# Altium PCB uPICoid-revA0.PcbDoc
Units mil, origin at the board's own origin, x right, y up, seen from the top; angles counter-clockwise.
Board outline 909.45 x 1421.26 mil, 2 copper layers (Top Layer, Bottom Layer); 36 components, 38 nets, 160 pads, 50 vias.
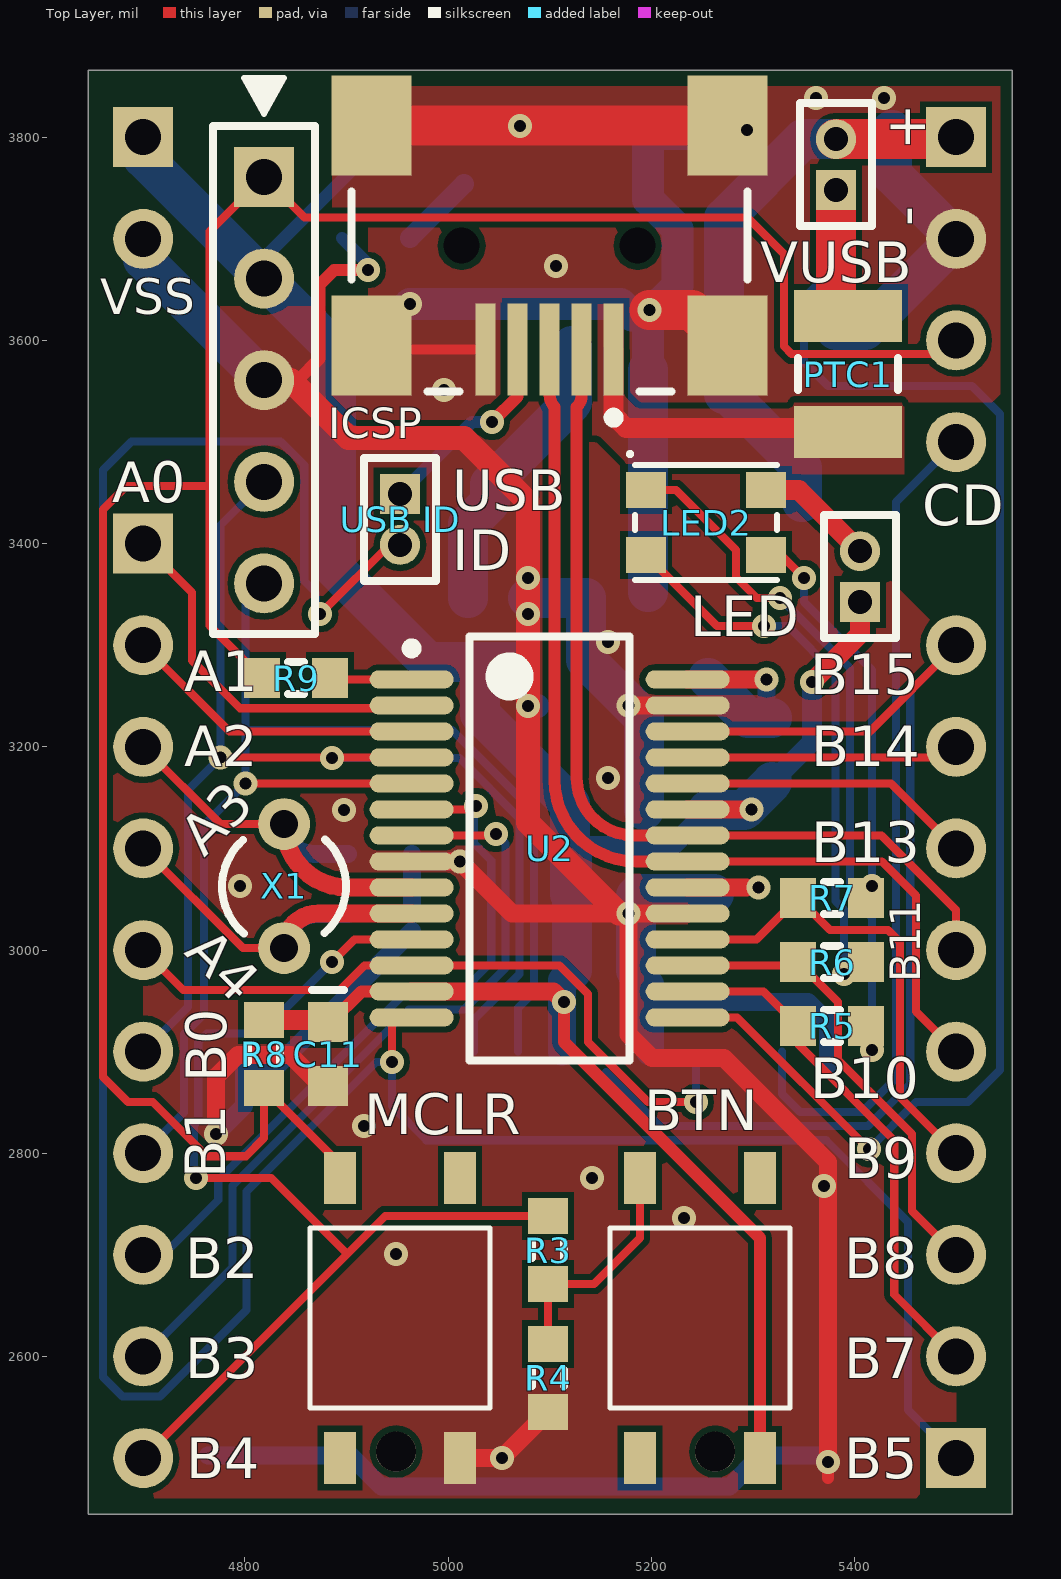
[diagram p0: Top Layer view]
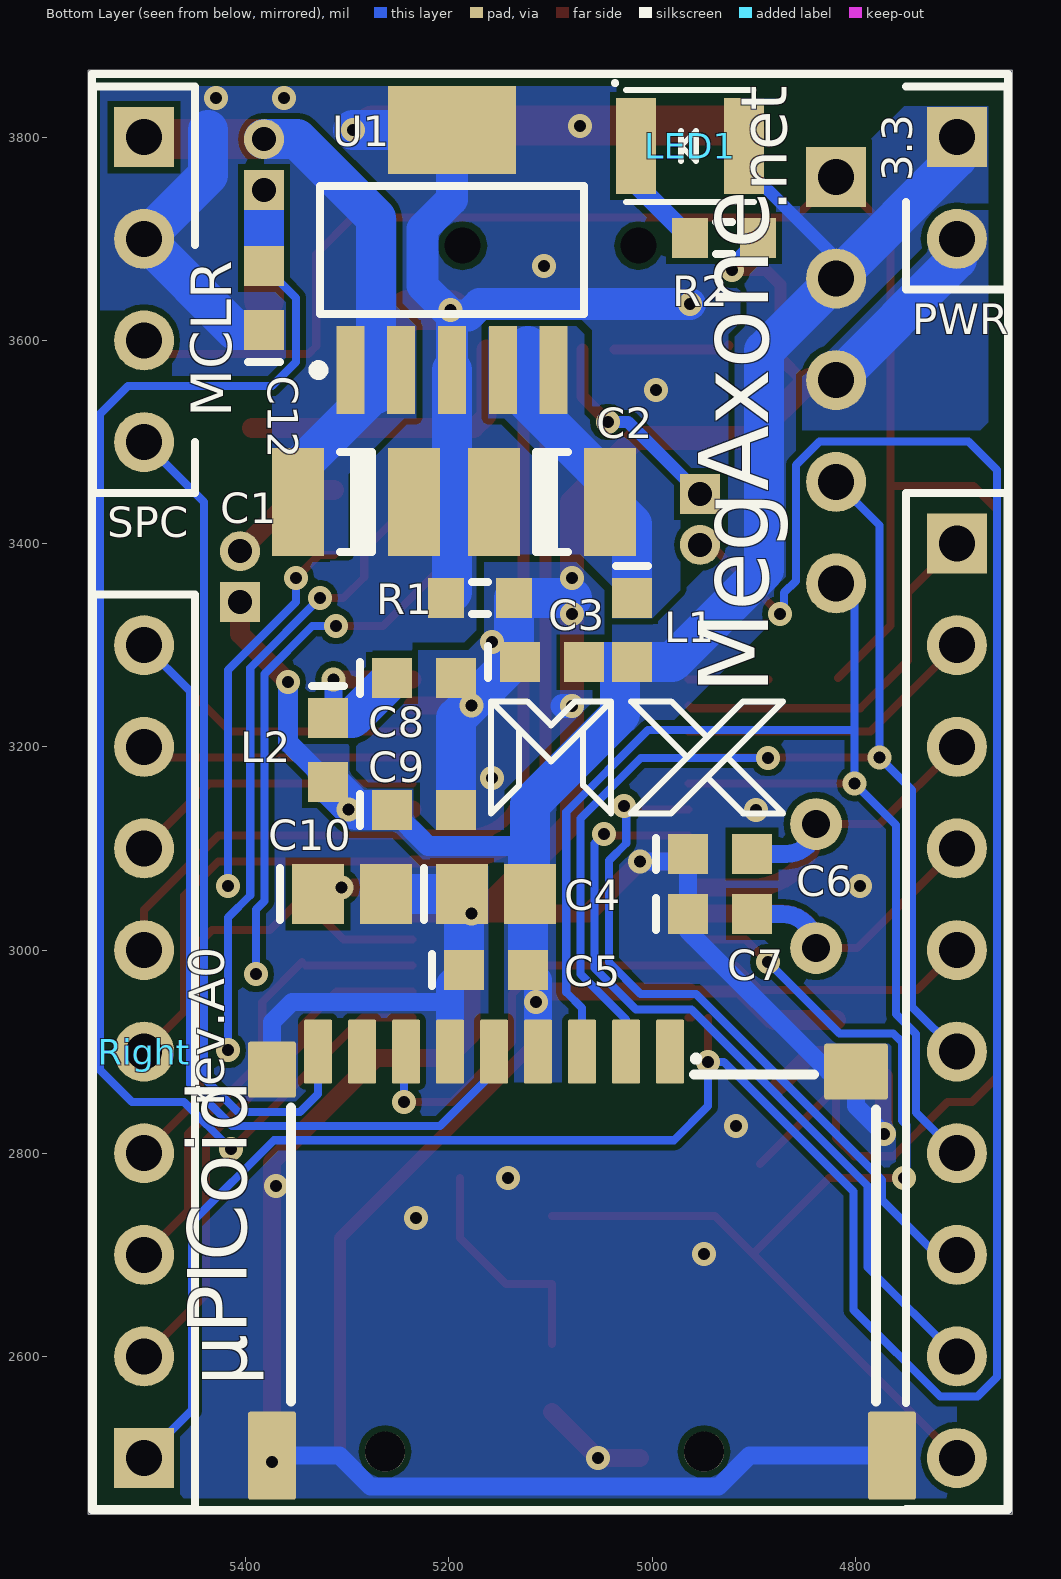
[diagram p1: Bottom Layer view, seen from below]

## Layer stack, top to bottom
Top Layer: signal copper 1.4
Dielectric: dielectric 12.6, FR-4, Dk 4.8
Bottom Layer: signal copper 1.4

## Board outline
4645.67,2444.88 5555.12,2444.88 5555.12,3866.14 4645.67,3866.14

## Design rules (kind name [scope] priority, off if disabled: settings)
Clearance [All] p1: gap=6
DiffPairsRouting [All] p1: maxlimit=10 minlimit=10 mostfreqgap=10 maxuncoupledlength=500
HoleSize [All] p1: absolutevalues=TRUE maxlimit=248.03 minlimit=11.81 maxpercent=80.000 minpercent=20.000
HoleToHoleClearance [All] p1: gap=9.84 allowstackedmicrovias=TRUE
MinimumSolderMaskSliver [All] p1: minsoldermaskwidth=3.94
PlaneConnect [All] p1: planeconnectstyle=Direct reliefexpansion=20 reliefentries=4 reliefconductorwidth=10 reliefairgap=10
PolygonConnect [All] p1: connectstyle=Direct reliefconductorwidth=10 reliefentries=4 polygonreliefangle="90 Angle"
RoutingVias [All] p1: holewidth=11.81 width=23.62 viastyle="Through Hole" minholewidth=11.81 minwidth=23.62 maxholewidth=248.03 maxwidth=275.59
SilkToSilkClearance [All] p1: silktosilkclearance=3.94
SilkscreenOverComponentPads [All] p1: minsilkscreentomaskgap=3.94
SolderMaskExpansion [All] p1: expansion=1.97
Width [All] p1: maxlimit=500 minlimit=6 preferedwidth=6
21 further rules are at their usual default settings.

## Classes and differential pairs
differential pair USB_D: +USB_D_P -USB_D_N

## Components (designator, comment, footprint, x,y, rotation, side; value= is the part's Value field where it differs from the comment)
BTN "Tact Button NO" "TACT SMD 4.5×4.5mm" 5188.98,2500 r90 top
C1 "10µF" CAPC3225N 5291.34,3440.94 r0 bottom
C2 "10µF" CAPC3225N 5098.43,3440.94 r180 bottom
C3 "100nF" CAPC1608N 5098.43,3283.46 r180 bottom
C4 "10µF" CAPC2012N 5153.54,3055.12 r180 bottom
C5 "100nF" CAPC1608N 5153.54,2980.32 r180 bottom
C6 "15pF" CAPC1608N 4933.07,3094.49 r180 bottom
C7 "15pF" CAPC1608N 4933.07,3035.43 r180 bottom
C8 "100nF" CAPC1608N 5224.41,3267.72 r180 bottom
C9 "100nF" CAPC1608N 5224.41,3137.8 r180 bottom
C10 "10µF" CAPC2012N 5295.28,3055.12 r180 bottom
C11 "100nF" CAPC1608N 4881.89,2897.64 r270 top
C12 "100nF" CAPC1608N 5381.89,3641.73 r90 bottom
ICSP "Header 5" HDR1X5 4818.9,3760.84 r270 top (schematic designator ISCP)
L1 "120R" INDC1608N 5019.69,3314.96 r270 bottom
L2 "120R" INDC1608N 5318.9,3196.85 r270 bottom
LED "MHDR1X2" MHDR1X2 5405.51,3342.52 r90 top
LED1 "Green" "LED PLCC-2" 5015.75,3791.34 r90 bottom
LED2 "LED RGB common A" "LED 3528m" 5204.72,3389.76 r90 top
MCLR "Tact Button NO" "TACT SMD 4.5×4.5mm" 4893.7,2500 r90 top
PTC1 "500mA" RESC3225N 5393.7,3566.93 r90 top
R1 "0" RESC1608N 5169.29,3346.46 r180 bottom
R2 "470" RESC1608N 4929.13,3700.79 r0 bottom
R3 "470" RESC1608N 5098.43,2704.72 r270 top
R4 "10K" RESC1608N 5098.43,2578.74 r90 top
R5 "470" RESC1608N 5377.95,2925.2 r0 top
R6 "330" RESC1608N 5377.95,2988.19 r0 top
R7 "330" RESC1608N 5377.95,3051.18 r0 top
R8 "10K" RESC1608N 4818.9,2897.64 r90 top
R9 "470" RESC1608N 4850.39,3267.72 r0 top
Right "Header 9" HDR1X9 5500,2500 r90 bottom
U1 "TPS7A4533" SOT223-6N 5196.85,3688.98 r90 bottom
U2 "PIC32MX250F128B" SSOP28_N 5100,3100 r0 top
"USB ID" "MHDR1X2" MHDR1X2 4952.76,3448.82 r270 top (schematic designator "USD ID")
VUSB "MHDR1X2" MHDR1X2 5381.89,3748.03 r90 top
X1 "Crystal" BCY-W2/D3.1 4838.58,3062.99 r0 top

## Footprints (in the part's own frame and the unit in brackets; to place one, negate y for a bottom-side part, rotate by r counter-clockwise, add the part's x,y. Pads: shape width x height; smd on the part's side, far side on the other; paste and mask are expansions set on the pad)
BCY-W2/D3.1 [mm] "Crystal, Thru-Hole; 2 Leads; Body 3.1 x 8.2 mm (Dia.xH)"
  round 1.3 hole 0.7: 1(0,1.55) 2(0,-1.55)
  silkscreen extent -1.55,-1.19 1.55,1.17
CAPC1608N [mm] "Chip Capacitor, Body 1.6x0.8mm, IPC Medium Density"
  rect 1x1 smd: 1(-0.8,0) 2(0.8,0)
  silkscreen extent -1.6,-0.4 -1.6,0.4, body extent -0.87,-0.48 0.87,0.48, height 0.85
CAPC2012N [mm] "Chip Capacitor, Body 2.0x1.3mm, IPC Medium Density"
  rect 1.3x1.5 smd: 1(-0.85,0) 2(0.85,0)
  silkscreen extent -1.8,-0.65 -1.8,0.65, body extent -1.1,-0.72 1.1,0.72, height 1.1
CAPC3225N [mm] "Chip Capacitor, Body 3.2x2.5mm, IPC Medium Density"
  rect 1.3x2.7 smd: 1(-1.45,0) 2(1.45,0)
  silkscreen extent -0.4,-1.25 0.4,1.25, body extent -1.7,-1.35 1.7,1.35, height 1.35
HDR1X5 [mm] "Connector; Header; 5 Position"
  rect 1.5x1.5 hole 0.9: 1(0,0)
  round 1.5 hole 0.9: 2(2.54,0) 3(5.08,0) 4(7.62,0) 5(10.16,0)
  silkscreen extent -1.27,-1.27 11.43,1.27
HDR1X9 [mm] "Connector; Header; 9 Position"
  rect 1.5x1.5 hole 0.9: 1(0,0)
  round 1.5 hole 0.9: 2(2.54,0) 3(5.08,0) 4(7.62,0) 5(10.16,0) 6(12.7,0) 7(15.24,0) 8(17.78,0) 9(20.32,0)
  silkscreen extent -1.27,-1.27 21.59,1.27
INDC1608N [mm] "Chip Inductor, Body 1.6x0.8mm, IPC Medium Density"
  rect 1x1 smd: 1(-0.8,0) 2(0.8,0)
  silkscreen extent -1.6,-0.4 -1.6,0.4, body extent -0.87,-0.48 0.87,0.48, height 0.71
"LED 3528m" [mm] "LED RGB 3528m common A"
  rect 0.9x1 smd: 1(1.6,0.25) 2(1.6,-2.75) 3(-0.025,-2.75) 4(-0.025,0.25)
  silkscreen extent -0.65,-3.03 2.52,0.67, body extent -0.65,-3.03 2.22,0.53, height 1.9
"LED PLCC-2" [mm] "LED PLCC-2 3.2x2.8mm"
  rect 2.4x1 smd: 1(0,0) 2(0,-2.7)
  silkscreen extent -1.4,-2.95 1.6,0.55, body extent -1.4,-2.95 1.4,0.25, height 1.9
MHDR1X2 [mm] "Connector; Header; 2 Position"
  rect 1x1 hole 0.6: 1(0,0)
  round 1 hole 0.6: 2(1.27,0)
  silkscreen extent -0.9,-0.9 2.17,0.9
RESC1608N [mm] "Chip Resistor, Body 1.6x0.8mm, IPC Medium Density"
  rect 0.9x1 smd: 1(-0.85,0) 2(0.85,0)
  silkscreen extent -0.2,-0.4 0.2,0.4, body extent -0.85,-0.48 0.85,0.48, height 0.6
RESC3225N [mm] "Chip Resistor, Body 3.2x2.5mm, IPC Medium Density"
  rect 1.3x2.7 smd: 1(-1.45,0) 2(1.45,0)
  silkscreen extent -0.4,-1.25 0.4,1.25, body extent -1.68,-1.32 1.68,1.32, height 0.71
SOT223-6N [mm] "SOT223, 6-Leads, Body 6.5x3.5mm, Pitch 1.27mm, Lead Span 7mm, IPC Medium Density"
  rect 2.2x0.7 smd: 1(-3,2.54) 2(-3,1.27) 3(-3,0) 4(-3,-1.27) 5(-3,-2.54)
  rect 2.2x3.2 smd: 6(3,0)
  silkscreen extent -3.12,-3.3 1.6,3.47, body extent -1.77,-3.27 1.77,3.27, height 1.8
SSOP28_N [mm] "SOP, 28-Leads, Body 10.2x5.3mm, Pitch 0.65mm, IPC Medium Density"
  oval 2.1x0.45 smd: 1(-3.45,4.225) 2(-3.45,3.575) 3(-3.45,2.925) 4(-3.45,2.275) 5(-3.45,1.625) 6(-3.45,0.975) 7(-3.45,0.325) 8(-3.45,-0.325) 9(-3.45,-0.975) 10(-3.45,-1.625) 11(-3.45,-2.275) 12(-3.45,-2.925) 13(-3.45,-3.575) 14(-3.45,-4.225) 15(3.45,-4.225) 16(3.45,-3.575) 17(3.45,-2.925) 18(3.45,-2.275) 19(3.45,-1.625) 20(3.45,-0.975) 21(3.45,-0.325) 22(3.45,0.325) 23(3.45,0.975) 24(3.45,1.625) 25(3.45,2.275) 26(3.45,2.925) 27(3.45,3.575) 28(3.45,4.225)
  silkscreen extent -3.57,-5.3 2,5.3, body extent -2.7,-5.3 2.7,5.3, height 1.99
"TACT SMD 4.5×4.5mm" [mm] "Tact push-button SMD 4.5×4.5mm body"
  rect 1.3x0.8 smd: 1(0,-3) 2(7,-3) 3(0,0) 4(7,0)
  silkscreen extent 1.25,-3.75 5.75,0.75, body extent 1.25,-3.75 5.75,0.75, height 3.8

## Part data
C1 C2 C3 C4 C5 C6 C7 C8 C9 C10 C11 C12: library part Capacitor
ICSP: "Header, 5-Pin"
L1 L2: library part Inductor
LED "USB ID" VUSB: "Header, 2-Pin"
LED1: library part LED
PTC1: library part PTC
R1 R2 R3 R4 R5 R6 R7 R8 R9: library part Resistor
Right: "Header, 9-Pin"
U1: library part TPS7A45xx
U2: library part PIC32MX220FxxxB

## Free pads (board coordinates)
  rect 59.06x59.06 hole 35.43: 1(4700,3400) 1(4700,3800) 1(5500,3800)
  rrect10% 27.56x62.99 smd far side: 1(4982.28,2900) 2(5025.59,2900) 3(5068.9,2900) 4(5112.2,2900) 5(5155.51,2900) 6(5198.82,2900) 7(5242.13,2900) 8(5285.43,2900) 9(5328.74,2900)
  rect 19.68x90.55 smd: 1(5162.99,3590.94) 2(5131.5,3590.94) 3(5100,3590.94) 4(5068.51,3590.94) 5(5037.01,3590.94)
  round 59.06 hole 35.43: 2(4700,3300) 2(4700,3700) 2(5500,3700) 3(4700,3200) 3(5500,3600) 4(4700,3100) 4(5500,3500) 5(4700,3000) 6(4700,2900) 7(4700,2800) 8(4700,2700) 9(4700,2600) 10(4700,2500)
  rect 78.74x98.43 smd: 6(4924.8,3594.88) 7(4924.8,3811.42) 8(5275.2,3594.88) 9(5275.2,3811.42)
  rrect10% 47.24x55.12 smd far side: 10(5374.02,2882.28)
  rrect10% 47.24x86.61 smd far side: 11(5374.02,2502.36) 12(4763.78,2502.36)
  rrect10% 62.99x55.12 smd far side: 13(4799.21,2880.32)
  round 23.62 hole 35.43 unplated: MH1(5013.39,3693.31) MH2(5186.61,3693.31)
  round 39.37 hole 39.37 unplated: ""(4948.82,2506.3) ""(5262.8,2506.3)

## Via types
v1: diameter 23.62, hole 11.81, Top Layer to Bottom Layer, tented both sides, 49 vias
v2: diameter 23.62/23.62 (per signal layer), hole 11.81, Top Layer to Bottom Layer, tented both sides, 1 vias

## Nets (pads, with @x,y where several pads share a name; then routed paths per layer and width w, separated by ;. In a path a pad name is that pad's centre, name@x,y a point inside that pad or via, vN(x,y) a via of type N, cw(c..) or ccw(c..) an arc to the next point about the centre after c; other vN are vias at no path point)
GND: C1.1 C2.1 C12.1 pad.2@5500,3700 pad.5@5037.01,3590.94 pad.6@4924.8,3594.88 pad.7@4924.8,3811.42 pad.8@5275.2,3594.88 pad.9@5275.2,3811.42 R1.1 U1.3 U1.6 | length 1659.1
  Top Layer w10: pad.6@4924.8,3594.88 4928.74,3590.94 pad.5@5037.01,3590.94
  Top Layer w39.37: pad.7@4924.8,3811.42 pad.9@5275.2,3811.42 ; v1(5198.52,3629.92) 5240.16,3629.92 pad.8@5275.2,3594.88
  Bottom Layer w31.5: v1(4962.5,3635.92) 5169.64,3635.92 5180.95,3624.61 v1@5196.85,3624.61 ; U1.3 v1@5196.85,3624.61 ; U1.6 5196.85,3738.88 5226.08,3709.65 5226.08,3653.84 v1@5196.85,3624.61
  Bottom Layer w39.37: R1.1@5196.85,3352.36 U1.3 ; U1.6 v1(5294.1,3807.09) ; C12.1 5410.24,3610.24 5500,3700 5437.01,3762.99 5437.01,3807.08
  other v1: 4996.06,3551.18 5106.3,3673.23 5070.87,3811.02 5362.2,3838.58 5429.13,3838.58
NetBTN_2: BTN.4 R3.2 R4.2 | length 227.4
  Top Layer w8: R4.2 R3.2 5143.7,2671.26 5188.98,2716.54 BTN.4
NetC2_2: C2.2 L1.1 U1.4 U1.5 | length 290.4
  Bottom Layer w39.37: L1.1 5019.69,3419.29 C2.2 5041.34,3458.66 5122.05,3539.37 5122.05,3594.49
NetC6_2: C6.2 pad.3@4700,3200 U2.9 X1.1 | length 411.1
  Top Layer w8: pad.3@4700,3200 4775.98,3124.02 X1.1
  Top Layer w17.72: X1.1 ccw(c4900.98,3124.02) 4900.98,3061.61 U2.9
  Bottom Layer w17.72: X1.1 ccw(c4868.11,3124.02) 4868.11,3094.49 C6.2
NetC7_2: C7.2 pad.4@4700,3100 U2.10 X1.2 | length 406.3
  Top Layer w8: pad.4@4700,3100 4798.03,3001.97 X1.2
  Top Layer w17.72: X1.2 cw(c4872.64,3001.97) 4872.64,3036.02 U2.10
  Bottom Layer w17.72: X1.2 cw(c4872.05,3001.97) 4872.05,3035.43 C7.2
NetC8_1: C8.1 L2.1 U2.28 | length 189.7
  Top Layer w17.72: U2.28 v1(5313.58,3266.34)
  Bottom Layer w17.72: L2.1@5313.58,3233.66 v1(5313.58,3266.34)
  Bottom Layer w39.37: C8.1 5295.28,3228.35 L2.1
NetC10_1: C10.1 U2.20 | length 58.1
  Top Layer w17.72: U2.20 v1@5293.9,3061.61
  other v1: 5305.71,3061.61
NetCONN1_1: pad.1@5162.99,3590.94 PTC1.1 | length 300.7
  Top Layer w19.68: pad.1@5162.99,3590.94 5162.99,3525.98 5175.2,3513.78 PTC1.1@5393.7,3513.78
NetCONN1_4: "USB ID.1" pad.4@5068.51,3590.94 | length 201.6
  Top Layer w11.81: v1(5043.31,3519.68) 5068.51,3544.88 pad.4@5068.51,3590.94
  Bottom Layer w11.81: 4952.76,3448.82 5023.62,3519.68 v1(5043.31,3519.68)
NetISCP_1: ICSP.1 MCLR.4 pad.3@5500,3600 R8.1 R9.1 | length 2369.4
  Top Layer w8: R9.1 4765.37,3319.28 4765.37,3456.69 ; MCLR.4@4893.7,2789.37 R8.1 4818.9,2814.96 4801.02,2797.09 4762.62,2797.09 4709.31,2850.39 4685.04,2850.39 4660.47,2874.96 4660.47,3433.67 4683.5,3456.69 4765.37,3456.69 ; pad.3@5486.61,3586.61 5338.22,3586.61 5330.55,3594.28 5330.55,3685.2 5294.72,3721.02 4858.72,3721.02 ICSP.1 4765.37,3707.32 4765.37,3456.69 ; pad.3@5490.55,3590.55 pad.3@5500,3600
NetISCP_4: ICSP.4 pad.2@5025.59,2900 pad.6@4700,2900 U2.4 | length 1255.6
  Top Layer w8: v1(4776.18,3189.57) U2.4
  Bottom Layer w8: pad.6@4700,2900 4744.09,2944.09 4744.09,3157.48 v1(4776.18,3189.57) 4776.18,3418.13 ICSP.4 ; v1(4885.83,3188.98) 5011.16,3188.98 5070.49,3129.65 5070.49,2976.38 5025.59,2931.48 pad.2@5025.59,2900
NetISCP_5: ICSP.5 pad.3@5068.9,2900 pad.7@4700,2800 U2.5 | length 1315.3
  Top Layer w8: v1(4800.59,3163.98) U2.5
  Bottom Layer w8: pad.7@4700,2800 4740.16,2840.16 4740.16,2917.32 4759.84,2937.01 4759.84,3123.23 v1(4800.59,3163.98) 4800.59,3216.54 ; ICSP.5@4800.59,3350.39 4800.59,3216.54 ; pad.3@5068.9,2900 5068.9,2942.91 5084.49,2958.5 5084.49,3135.98 5003.94,3216.54 4800.59,3216.54
NetLED1_K: LED1.1 R2.2 | length 75.2
  Bottom Layer w19.68: R2.2 LED1.1@5015.75,3753.94
NetLED2_A: LED2.2 LED.2 | length 117.5
  Top Layer w19.68: LED2.2 5345.28,3452.76 LED.2
NetLED2_KB: LED2.3 R7.2 | length 377.7
  Top Layer w8: LED2.3 5327.76,3388.78 v1(5350.39,3366.14)
  Bottom Layer w8: v1(5350.39,3366.14) 5350.39,3342.52 5417.32,3275.59 v1(5417.32,3062.99)
NetLED2_KG: LED2.4 R6.2 | length 533.9
  Top Layer w8: LED2.4 5264.76,3318.9 v1(5311.02,3318.9)
  Bottom Layer w8: v1(5311.02,3318.9) 5334.42,3318.9 5381.51,3271.8 5381.51,3048.16 5389.76,3039.91 v1(5389.76,2976.38)
NetLED2_KR: LED2.1 R5.2 | length 674
  Top Layer w8: LED2.1 5224.41,3452.76 5283.31,3393.86 5283.31,3366.92 5303.89,3346.34 v1(5326.77,3346.34)
  Bottom Layer w8: v1(5326.77,3346.34) 5395.51,3277.6 5395.51,3053.96 5417.32,3032.15 v1(5417.32,2901.57)
NetLeft_1: pad.1@4700,3400 U2.2 | length 371.6
  Top Layer w8: pad.1@4700,3400 4748.03,3351.97 4748.03,3285.07 4795.07,3238.03 4961.46,3238.03 U2.2
NetLeft_2: pad.2@4700,3300 U2.3 | length 299.3
  Top Layer w8: pad.2@4700,3300 4784.84,3215.16 U2.3
NetLeft_5: pad.5@4700,3000 pad.7@5242.13,2900 U2.12 | length 701.4
  Top Layer w8: pad.5@4700,3000 4739.37,2960.63 4893.7,2960.63 4917.91,2984.84 U2.12 5109.65,2984.84 5137.8,2956.69 5137.8,2909.45 5196.85,2850.39 v1(5244.09,2850.39)
  Bottom Layer w8: v1(5244.09,2850.39) pad.7@5244.09,2898.03
NetLeft_8: pad.8@4700,2700 U2.6 | length 695
  Top Layer w8: U2.6 v1@5024.21,3138.39
  Bottom Layer w8: pad.8@4700,2700 4719.69,2700 4773.78,2754.09 4773.78,2773.78 4956.69,2956.69 5011.21,2956.69 5042.49,2987.98 5042.49,3088.08 5025.43,3105.14 5025.43,3139.61 v1(5027.56,3141.73)
NetLeft_9: pad.9@4700,2600 U2.7 | length 779.3
  Top Layer w8: U2.7 v1@5045.87,3112.8
  Bottom Layer w8: pad.9@4700,2600 4787.78,2687.78 4787.78,2767.98 4961.3,2941.5 5015.81,2941.5 5056.49,2982.18 5056.49,3104.93 v1(5047.24,3114.17)
NetLeft_10: pad.10@4700,2500 R3.1 U2.11 | length 1065.3
  Top Layer w8: pad.10@4700,2500 4900.79,2700.79 ; v1(4751.97,2775.59) 4825.98,2775.59 4900.79,2700.79 ; v1(4885.83,2988.19) 4908.07,3010.43 U2.11 ; R3.1 4938.19,2738.19 4900.79,2700.79
  Bottom Layer w8: v1(4751.97,2775.59) 4749.84,2777.72 4749.84,2827.93 4754.16,2832.25 4754.16,2909.45 4762.58,2917.87 4815.51,2917.87 v1(4885.83,2988.19)
NetR5_1: R5.1 Right.2 U2.16 | length 512.4
  Top Layer w8: U2.16 5310.43,2959.25 R5.1 5344.49,2907.37 5439.2,2812.66 5439.2,2660.8 Right.2
NetR6_1: R6.1 Right.3 U2.17 | length 457.9
  Top Layer w8: U2.17 R6.1@5341.14,2984.84 ; R6.1 5383.7,2948.98 5383.7,2891.89 5456.69,2818.9 5456.69,2743.31 Right.3
NetR7_1: R7.1 Right.4 U2.18 | length 474.6
  Top Layer w8: U2.18 5303.74,3010.43 R7.1 5375.98,3019.68 5433.07,3019.68 5444.88,3007.87 5444.88,2855.12 Right.4
NetR9_2: R9.2 U2.1 | length 78.9
  Top Layer w8: R9.2@4885.24,3266.34 U2.1
NetRight_1: "USB ID.2" Right.1 U2.14 | length 2762
  Top Layer w8: v1@4870.08,3334.65 4877.95,3334.65 4942.13,3398.82 4952.76,3398.82 ; v1(4944.88,2889.76) U2.14@4944.88,2933.07 ; U2.14@4961.22,2933.66 U2.14
  Bottom Layer w8: v1@4870.08,3334.65 4870.08,3351.72 4858.43,3363.37 4858.43,3477.22 4835.27,3500.37 4688.4,3500.37 4660.47,3472.44 4660.47,2579.69 4679.69,2560.47 4716.37,2560.47 4801.78,2645.88 4801.78,2762.18 4929.36,2889.76 v1(4944.88,2889.76) 4944.88,2846.46 4978.57,2812.77 5372.27,2812.77 5452.76,2732.28 5452.76,2547.24 Right.1
  other v1: 4874.02,3330.71
NetRight_7: Right.7 U2.24 | length 290.7
  Top Layer w8: U2.24 5436.02,3163.98 Right.7
NetRight_8: Right.8 U2.25 | length 253.7
  Top Layer w8: U2.25 Right.8@5489.57,3189.57
NetRight_9: pad.5@5155.51,2900 Right.9 U2.26 | length 1088.3
  Top Layer w8: U2.26 5415.16,3215.16 Right.9
  Bottom Layer w8: pad.5@5155.51,2879.92 5208.66,2826.77 5413.39,2826.77 5454.94,2868.33 5454.94,3254.94 Right.9
NetSD_9: pad.4@5500,3500 pad.9@5328.74,2900 | length 825.2
  Bottom Layer w8: pad.9@5328.74,2900 5328.74,2858.49 5346.46,2840.77 5407.59,2840.77 5440.94,2874.13 5440.94,3440.94 pad.4@5500,3500
USB_D_N: pad.2@5131.5,3590.94 Right.6 U2.22 | length 898.5
  Top Layer w8: U2.22 5426.8,3112.8 5500,3039.6 Right.6
  Top Layer w11.81: pad.2@5131.5,3590.94 5131.5,3546.21 cw(c5114.96,3546.21) 5126.66,3534.52 5126.66,3169.29 ccw(c5183.15,3169.29) 5183.15,3112.8 U2.22
USB_D_P: pad.3@5100,3590.94 Right.5 U2.21 | length 1010.2
  Top Layer w8: U2.21 5426.94,3087.2 5460.47,3053.67 5460.47,2939.53 Right.5
  Top Layer w11.81: pad.3@5100,3590.94 5100,3546.21 ccw(c5116.54,3546.21) 5104.84,3534.52 5104.84,3167.39 ccw(c5185.03,3167.39) 5185.03,3087.2 U2.21
VDD: BTN.1 C3.2 C4.2 C5.2 C9.1 C11.1 ICSP.2 L1.2 L2.2 LED1.2 LED.1 pad.1@4700,3800 pad.4@5112.2,2900 R8.2 U2.13 U2.23 | length 2613.8
  Top Layer w11.81: R8.2 R8.2@4820.87,2929.13 ; C11.1 4884.7,2929.13 4914.82,2959.25 U2.13 ; v1(5114.17,2948.82) 5114.17,2909.45 5307.09,2716.54 BTN.1
  Top Layer w17.72: U2.13 5103.74,2959.25 v1(5114.17,2948.82) ; U2.23 v1(5298.62,3138.39)
  Top Layer w19.68: R8.2 C11.1@4879.92,2931.1 ; v1(5358.27,3263.78) 5405.51,3311.02 LED.1
  Bottom Layer w11.81: ICSP.2 4818.9,3681.1 LED1.2@4909.45,3771.65
  Bottom Layer w19.68: 5120.17,3102.27 5122.05,3102.27 5220.38,3102.27 C9.1 ; L2.2 5358.27,3204.72 v1(5358.27,3263.78)
  Bottom Layer w27.56: pad.4@5112.2,2900 5112.2,2970.47 C5.2
  Bottom Layer w39.37: pad.1@4700,3779.74 ICSP.2 4889.76,3589.98 4889.76,3374.02 4980.31,3283.46 L1.2 ; L1.2@5031.5,3283.46 5031.5,3232.28 5120.08,3143.7 C4.2 ; C5.2 5122.05,3102.27 ; C9.1 5291.34,3137.8 L2.2
VIN: C1.2 pad.1@5500,3800 U1.1 U1.2 VUSB.2 | length 568.2
  Top Layer w39.37: VUSB.2 pad.1@5498.03,3798.03
  Bottom Layer w39.37: 5271.65,3547.24 5271.65,3720.47 5349.21,3798.03 VUSB.2 ; 5275.59,3547.24 5348.43,3474.41 C1.2
VSS: C3.1 C4.1 C5.1 C6.1 C7.1 C8.2 C9.2 C10.2 C11.2 ICSP.3 MCLR.1 pad.2@4700,3700 pad.6@5198.82,2900 pad.10@5374.02,2882.28 pad.11 pad.12 pad.13 R1.2 R2.1 R4.1 U2.8 U2.19 U2.27 | length 4259.3
  Top Layer w11.81: ICSP.3 4852.18,3560.84 4873.53,3582.19 4873.53,3654.84 4887.98,3669.29 v1(4921.26,3669.29) ; 5374.02,2480.32 v1(5374.02,2496.06)
  Top Layer w17.72: v1(4771.65,2818.9) 4771.65,2875.34 4793.06,2896.75 4844.74,2896.75 C11.2@4875.34,2866.14 ; U2.8 v1(5011.81,3087.2) 5062.99,3036.02 5168.19,3036.02 v1(5177.76,3036.02) ; MCLR.1 v1(5053.15,2500) R4.1 ; v1(5177.76,3240.75) U2.27 ; U2.19 v1(5177.76,3036.02) ; v1(5374.02,2496.06) 5374.02,2791.34 5271.65,2893.7 5200.79,2893.7 5177.76,2916.73 v1(5177.76,3036.02)
  Top Layer w23.62: ICSP.3@4845.07,3560.84 4901.98,3503.94 5015.75,3503.94 5078.74,3440.94 v1(5078.74,3366.14) v1(5078.74,3330.71) v2(5078.74,3240.16) 5078.74,3125.47 v1@5168.19,3036.02
  Bottom Layer w11.81: R2.1 4921.26,3675.2 v1(4921.26,3669.29)
  Bottom Layer w17.72: pad.12 4903.9,2502.36 4934.51,2471.76 5055.12,2471.76 5277.1,2471.76 5307.71,2502.36 pad.11 ; v1(4771.65,2818.9) 4799.21,2846.46 pad.13 4826.09,2880.32 C7.1@4964.57,3018.8 ; C7.1 C6.1 ; C6.1@4971.85,3087.2 v1(5011.81,3087.2) ; 5198.82,2948.82 5354.33,2948.82 5374.02,2929.13 pad.10@5374.02,2882.28
  Bottom Layer w23.62: v2(5078.74,3240.16) v2@5088.18,3240.16 ; C3.1@5129.92,3281.9 C3.1
  Bottom Layer w27.56: C5.1 5198.82,2966.54 5198.82,2948.82 pad.6@5198.82,2900
  Bottom Layer w39.37: pad.2@4700,3700 4700,3679.74 ICSP.3 ; 5078.74,3346.46 R1.2 5135.83,3285.43 5192.91,3228.35 C9.2 ; C5.1 5185.04,3053.15 C4.1 C10.2
  other v1: 4948.82,2700.79 5232.28,2736.22 5370.08,2767.72 5141.73,2775.59 4917.32,2826.77 4795.28,3062.99 4897.64,3137.8 5157.48,3169.29 5157.48,3303.15
VUSB: C12.2 PTC1.2 U2.15 VUSB.1 | length 1549.1
  Top Layer w8: U2.15 5284.48,2933.66 v1(5414.19,2803.95) ; 5378.19,3665.59 5381.89,3669.29
  Top Layer w39.37: PTC1.2@5381.89,3639.76 5381.89,3669.29 VUSB.1
  Bottom Layer w8: C12.2 5350.39,3641.73 5350.39,3578.74 5374.02,3555.12 5515.75,3555.12 5543.31,3527.56 5543.31,2881.89 5511.81,2850.39 5460.63,2850.39 v1(5414.19,2803.95)
  Bottom Layer w39.37: C12.2 VUSB.1
pads on no net: BTN.2 BTN.3 MCLR.2 MCLR.3

## Polygon pours and split planes (outlines as drawn)
VDD on Bottom Layer "Top Layer-No Net" (solid, remove dead copper, pour order 36): 5141.73,3086.61 5224.41,3086.61 5251.97,3114.17 5314.96,3114.17 5366.14,3165.35 5364.17,3197.83 5344.49,3202.76 5338.58,3208.66 5294.21,3208.66 5250.91,3165.35 5192.92,3165.35 5141.73,3118.11
VSS on Bottom Layer "Top Layer-No Net" (solid, remove dead copper, pour order 38): 4700,2600 4700,2500 4700,2461.42 4700.79,2460.63 4814.96,2460.63 5500,2460.63 5500,2500 5452.76,2547.24 5452.76,2732.28 5372.27,2812.77 4978.57,2812.77 4944.88,2846.46 4944.88,2889.76 4929.36,2889.76 4801.78,2762.18 4801.78,2700.79
VSS on Bottom Layer "Top Layer-No Net" (solid, remove dead copper, pour order 32): 5358.27,3204.72 5381.51,3204.72 5381.51,3048.16 5389.76,3039.91 5389.76,2976.38 5417.32,2976.38 5417.32,2901.57 5440.94,2901.57 5440.94,2874.13 5407.59,2840.77 5346.46,2840.77 5346.46,2826.77 5208.66,2826.77 5161.42,2874.02 5161.42,3082.68 5228.35,3082.68 5255.91,3110.24 5299.21,3110.24 5330.71,3141.73 5330.71,3177.17
VDD on Bottom Layer "Top Layer-No Net" (solid, remove dead copper, pour order 34): 5094.49,3149.61 5094.49,2968.5 5084.49,2958.5 5082.68,2956.69 5082.68,2870.08 5141.73,2870.08 5145.67,2874.02 5145.67,3027.56 5145.67,3094.49
VDD on Bottom Layer "Top Layer-No Net" (solid, remove dead copper, pour order 28): 4669.29,3830.71 4751.97,3830.71 4791.34,3791.34 4791.34,3732.28 4877.95,3732.28 4877.95,3691.23 4917.25,3651.93 4913.39,3648.06 4913.39,3618.11 4925.2,3606.3 4925.2,3397.64 5000,3322.83 5039.37,3322.83 5039.37,3216.54 4988.19,3216.54 4870.08,3334.65 4870.08,3351.72 4858.43,3363.37 4858.43,3566.77 4692.91,3732.28 4669.29,3732.28
VSS on Bottom Layer "Top Layer-No Net" (solid, remove dead copper, pour order 30): 4669.29,3728.35 4669.29,3519.48 4677.17,3511.81 4862.2,3511.81 4866.14,3515.75 4866.14,3566.93 4696.85,3728.35
VSS on Bottom Layer "Top Layer-No Net" (solid, remove dead copper, pour order 20): 4800.59,3216.54 5003.94,3216.54 5042.49,3177.98 5042.49,2987.98 5011.21,2956.69 4956.69,2956.69 4773.78,2773.78 4771.97,2775.59 4751.97,2775.59 4751.97,2929.13 4759.84,2937.01 4759.84,3123.23
GND on Bottom Layer "Top Layer-No Net" (solid, remove dead copper, pour order 14): 5322.83,3850.39 5539.37,3850.39 5543.31,3846.46 5543.31,3629.92 5500,3629.92 5472.44,3602.36 5472.44,3555.12 5374.02,3555.12 5350.39,3578.74 5350.39,3641.73 5381.89,3673.23 5381.89,3677.17 5381.89,3748.03 5381.89,3798.03 5347.64,3798.03 5322.83,3822.83
GND on Bottom Layer "Top Layer-No Net" (solid, remove dead copper, pour order 12): 5167.91,3523.62 5167.91,3615.55 5161.42,3622.05 5070.87,3622.05 5059.06,3610.24 5059.06,3535.43 5043.31,3519.68 5023.62,3519.68 4952.76,3448.82 4925.2,3448.82 4925.2,3606.3 4913.39,3618.11 4913.39,3657.48 4913.39,3661.42 4921.26,3669.29 4933.07,3681.1 4980.31,3681.1 4980.31,3708.66 5035.43,3763.78 5035.43,3850.39 5259.84,3850.39 5322.83,3850.39 5322.83,3838.58 5350.39,3811.02 5251.97,3712.6 5251.97,3633.86 5232.28,3614.17 5225.79,3607.68 5225.79,3523.62
GND on Bottom Layer "Top Layer-No Net" (solid, remove dead copper, pour order 10): 5161.42,3523.62 5145.67,3523.62 5094.49,3472.44 5094.49,3389.76 5173.23,3389.76 5173.23,3314.96 5185.04,3303.15 5236.22,3303.15 5236.22,3295.28 5275.59,3295.28 5275.59,3275.59 5307.09,3244.09 5311.02,3248.03 5358.27,3248.03 5358.27,3264.01 5373.79,3279.53 5350.39,3302.92 5350.39,3342.52 5350.39,3389.76 5307.09,3433.07 5307.09,3507.87 5259.84,3507.87 5244.09,3523.62 5232.28,3523.62
VSS on Bottom Layer "Top Layer-No Net" (solid, remove dead copper, pour order 8): 5094.49,3381.89 5074.8,3381.89 5047.24,3354.33 5047.24,3311.02 5094.49,3311.02 5094.49,3263.78 5094.49,3255.91 5059.06,3255.91 5059.06,3244.09 5086.61,3216.54 5145.67,3157.48 5145.67,3118.11 5212.6,3118.11 5228.35,3133.86 5228.35,3161.42 5228.35,3165.35 5279.53,3165.35 5291.34,3177.17 5291.34,3200.79 5248.03,3244.09 5236.22,3255.91 5236.22,3287.4 5236.22,3295.28 5185.04,3295.28 5181.1,3295.28 5165.35,3311.02 5165.35,3381.89
NetC2_2 on Bottom Layer "Top Layer-No Net" (solid, remove dead copper, pour order 6): 5161.42,3614.17 5074.8,3614.17 5066.93,3606.3 5066.93,3527.56 5051.18,3511.81 5023.62,3511.81 5015.75,3503.94 4972.44,3460.63 4972.44,3354.33 5000,3326.77 5039.37,3326.77 5039.37,3358.27 5066.93,3385.83 5070.87,3389.76 5094.49,3389.76 5094.49,3472.44 5145.67,3523.62 5161.42,3523.62
VIN on Bottom Layer "Top Layer-No Net" (solid, remove dead copper, pour order 4): 5232.28,3614.17 5251.97,3633.86 5251.97,3720.47 5338.58,3807.09 5347.64,3798.03 5381.89,3798.03 5381.89,3665.35 5374.02,3665.35 5350.39,3641.73 5350.39,3578.74 5374.02,3555.12 5374.02,3389.76 5299.21,3389.76 5299.21,3468.5 5244.09,3523.62 5232.28,3523.62
VSS on Top Layer "Top Layer-No Net" (solid, remove dead copper, pour order 40): 4700,2500 4700,3000 4739.37,2960.63 4893.7,2960.63 5291.22,2960.63 5439.2,2812.66 5439.2,2660.8 5500,2600 5500,2500 5500,2460.63 4700.79,2460.63
NetCONN1_1 on Top Layer "Top Layer-No Net" (solid, remove dead copper, pour order 26): 5444.88,3539.37 5188.98,3539.37 5179.15,3549.2 5178.83,3549.51 5178.83,3642.22 5142.22,3642.22 5141.73,3641.73 5141.73,3503.94 5177.17,3468.5 5330.71,3468.5 5448.82,3468.5 5448.82,3539.37
VSS on Top Layer "Top Layer-No Net" (solid, remove dead copper, pour order 24): 4907.57,3287.4 4907.57,3268.21 4909.45,3266.34 4964.17,3266.34 4964.17,2984.84 5109.65,2984.84 5137.8,2956.69 5137.8,2933.07 5235.24,2933.07 5235.83,2933.66 5235.83,3215.16 5415.16,3215.16 5500,3300 5499.21,3300 5330.71,3468.5 5177.17,3468.5 5145.67,3500 5126.66,3500 5126.66,3287.4
VSS on Top Layer "Top Layer-No Net" (solid, remove dead copper, pour order 22): 4700,3200 4661.26,3200 4660.47,3200.79 4660.47,3102.36 4697.64,3102.36 4700,3100 4798.03,3001.97 4838.58,3001.97 4872.64,3036.02 4964.17,3036.02 4964.17,3163.98 4800.59,3163.98 4800.59,3165.16 4776.18,3189.57 4765.75,3200 4700,3200
GND on Top Layer "Top Layer-No Net" (solid, remove dead copper, pour order 16): 5314.96,3850.39 5543.31,3850.39 5543.31,3547.24 5535.43,3539.37 5342.52,3539.37 5188.98,3539.37 5177.17,3551.18 5177.17,3637.8 5051.18,3637.8 5051.18,3547.24 5023.62,3519.68 4909.45,3519.68 4909.45,3519.69 4885.83,3543.31 4885.83,3641.73 4921.26,3641.73 4921.26,3721.02 4885.83,3721.02 4885.83,3850.39
VSS on Top Layer "Top Layer-No Net" (solid, remove dead copper, pour order 18): 5104.84,3287.4 5104.84,3534.52 5100,3546.21 5068.51,3544.88 5027.56,3503.94 5015.75,3515.75 4917.32,3515.75 4885.83,3547.24 4885.83,3633.86 4765.37,3633.86 4765.37,3319.28 4797.24,3287.4

## Other copper
Bottom Layer:
  rectangle net VDD: 4996.06,3263.78 5086.61,3303.15

## Silkscreen, mask and mechanical layers (free items; w line width, h text height)
Top Overlay:
  circle w9.84: c5162.99,3524.02 r4.92
  region: 4818.9,3822.83 4799.21,3858.27 4838.58,3858.27
  lines w5.91: 4818.9,3822.83 4838.58,3858.27 4799.21,3858.27 4818.9,3822.83 ; 4818.9,3822.83 4818.9,3822.83
  lines w7.87: 4905.12,3659.84 4905.12,3746.46 ; 4979.92,3549.61 5011.42,3549.61 ; 5188.58,3549.61 5220.08,3549.61 ; 5294.88,3659.84 5294.88,3746.46
  text "+" at 5469.49,3787.4 h40 r90
  text "-" at 5469.49,3712.6 h40 r90
  text "VSS" at 4657.48,3625.98 h35
  text "A0" at 4669.29,3440.94 h40
  text "USB" at 5003.94,3433.07 h40
  text "CD" at 5466.54,3418.31 h40
  text "ID" at 5003.94,3374.02 h40
  text "A1" at 4740.16,3254.92 h40
  text "B15" at 5356.3,3251.97 h40
  text "A2" at 4740.16,3181.1 h40
  text "B14" at 5357.28,3181.1 h40
  text "A3" at 4759.84,3090.55 h40 r45
  text "B13" at 5357.28,3086.61 h40
  text "A4" at 4739.17,2997.05 h40 r315
  text "B11" at 5464.57,2968.5 h30 r90
  text "B0" at 4781.5,2870.08 h40 r90
  text "B10" at 5356.3,2854.33 h40
  text "B1" at 4780.51,2775.59 h40 r90
  text "B9" at 5389.76,2775.59 h40
  text "B2" at 4741.14,2677.17 h40
  text "B8" at 5389.76,2677.17 h40
  text "B3" at 4741.14,2578.74 h40
  text "B7" at 5389.76,2578.74 h40
  text "B4" at 4742.13,2480.32 h40
  text "B5" at 5389.76,2480.32 h40
Bottom Overlay:
  circle w10: c4956.69,2893.11 r0.98
  lines w5.91: 4926.1,3189.59 4870.98,3134.47 4910.35,3134.47 4945.79,3169.91 ; 4945.79,3209.28 4981.22,3244.71 5020.59,3244.71 4965.47,3189.59 ; 5067.83,3217.15 5067.83,3162.03 5040.28,3134.47 5040.28,3244.71 ; 5130.83,3217.15 5130.83,3162.03 5158.39,3134.47 5158.39,3244.71 ; 5040.28,3244.71 5099.33,3185.66 5158.39,3244.71 ; 5040.28,3244.71 5075.71,3244.71 5099.33,3221.09 5122.95,3244.71 5158.39,3244.71 ; 4870.98,3244.71 4910.35,3244.71 5020.59,3134.47 4981.22,3134.47 4870.98,3244.71
  lines w7.87: 4750,2450 4650,2450 4650,3375 4650,3450 4750,3450 4750,2554.13 ; 4750,3736.22 4750,3650 4650,3650 4650,3850 4750,3850 ; 5450,3500 5450,3450 5550,3450 5550,3850 5450,3850 5450,3693.9 ; 4649.61,2448.82 4649.61,3862.2 5551.18,3862.2 5551.18,2448.82 4649.61,2448.82
  lines w10: 4779.53,2555.51 4779.53,2842.91 ; 4840.55,2877.36 4958.66,2877.36 ; 5355.31,2555.51 5355.31,2844.88
  text "3.3" at 4744.09,3756.89 h30 r270
  text ".net" at 4852.36,3727.36 h78.74 r270
  text "PWR" at 4744.09,3606.3 h30
  text "MCLR" at 5414.37,3524.61 h40 r270
  text "SPC" at 5536.42,3406.5 h30
  text "MegAxone" at 4863.19,3251.97 h118.11 r270
  text "rev.A0" at 5409.45,2846.46 h60 r270
  text "µPICoid" at 5379.92,2570.87 h100 r270